# Altium PCB Soil_Moisture_Sensor.PcbDoc
Units mm, origin at the board's own origin, x right, y up, seen from the top; angles counter-clockwise.
Board outline 188.16 x 66 mm, 2 copper layers (Top Layer, Bottom Layer); 85 components, 58 nets, 300 pads, 137 vias.
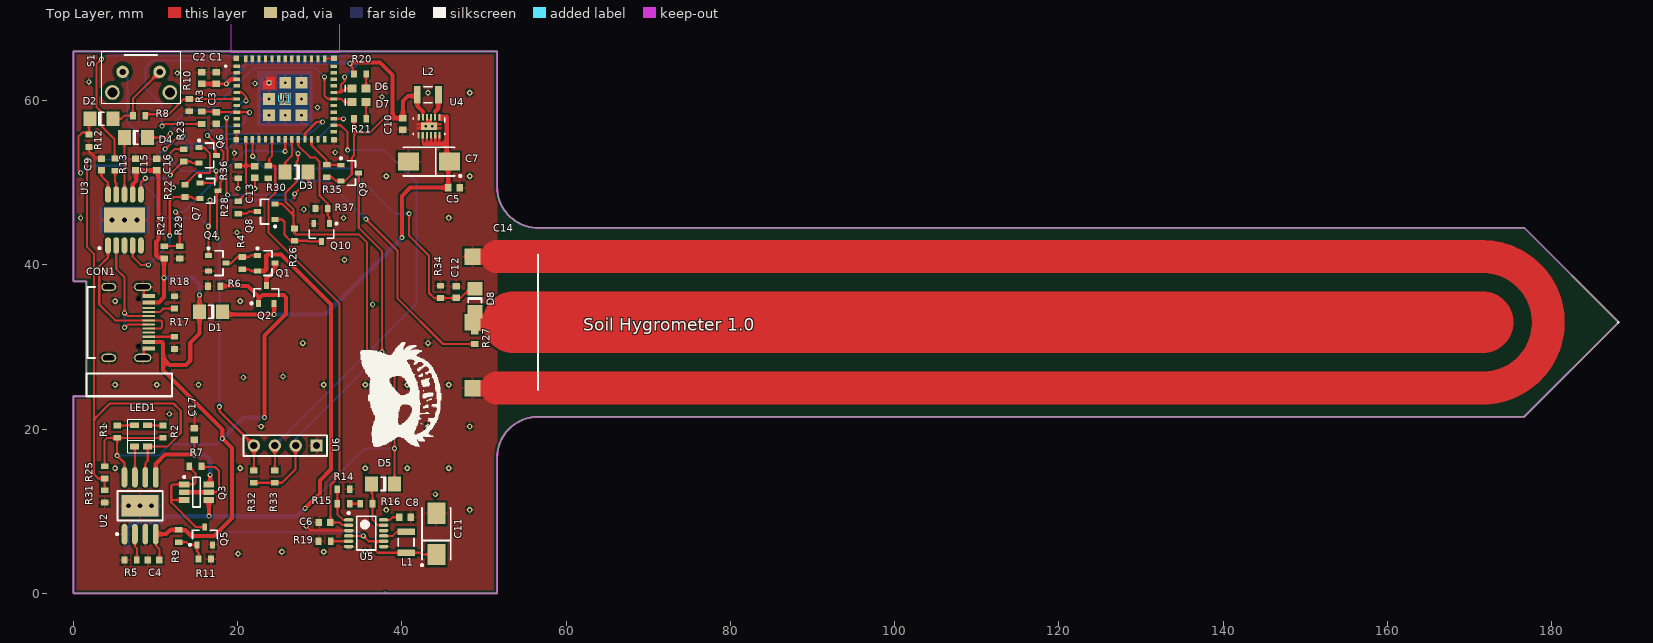
[diagram p0: Top Layer view]
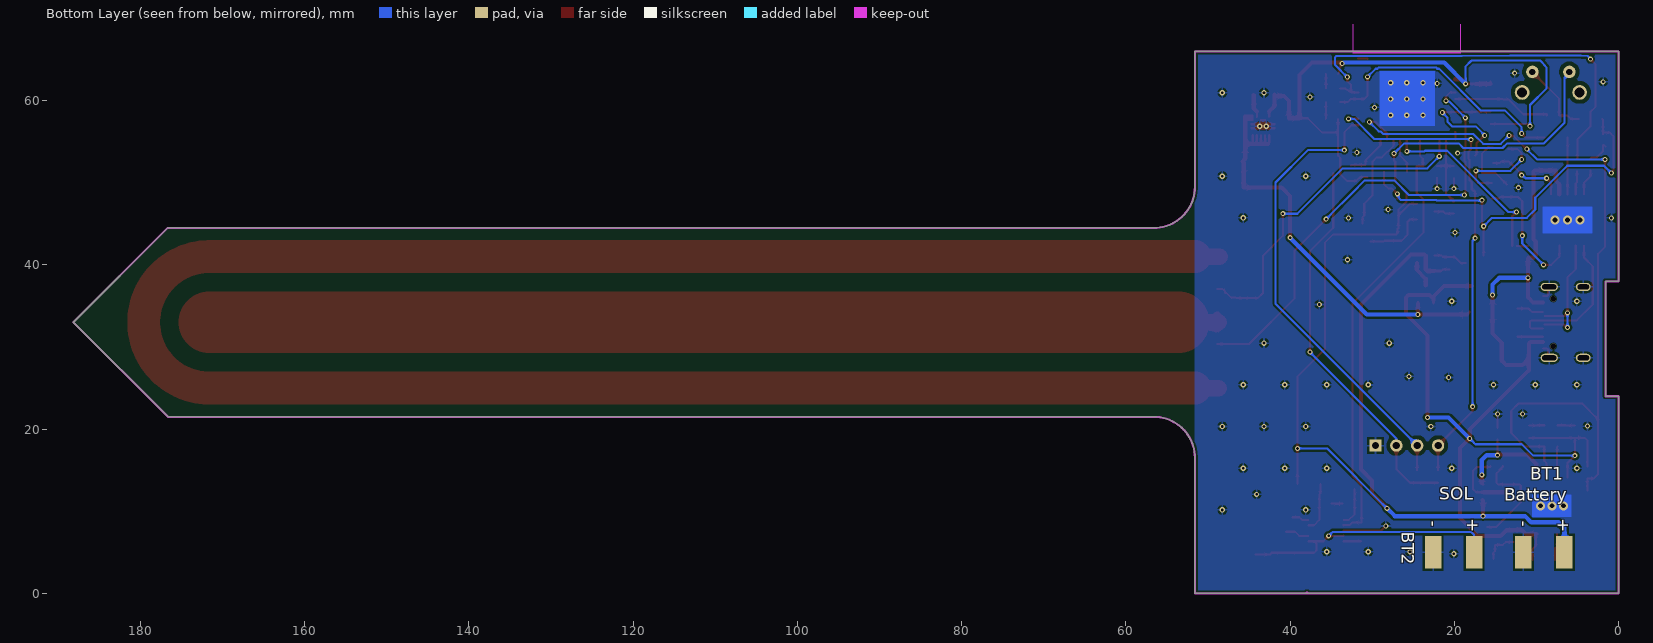
[diagram p1: Bottom Layer view, seen from below]

## Layer stack, top to bottom
Top Solder: solder mask 0.0102, Solder Resist, Dk 3.5
Top Layer: signal copper 0.0356
Dielectric 1: dielectric 0.32, FR-4, Dk 4.8
Bottom Layer: signal copper 0.0356
Bottom Solder: solder mask 0.0102, Solder Resist, Dk 3.5

## Board outline
0,0 0,24 1.6,24 1.6,38 0,38 0,66 51.6,66 51.6,49.5 ccw(c56.6,49.5) 56.6,44.5 176.683,44.5 188.163,33.02 176.643,21.5 176.6,21.5 56.6,21.5 ccw(c56.6,16.5) 51.6,16.5 51.6,0

## Design rules (kind name [scope] priority, off if disabled: settings)
Clearance Clearance_1 [HasFootprint('USB-TYPE_C')] p1: gap=0.1 ignorepadtopadclearanceinfootprint=TRUE
Clearance DSS0012A [HasFootprint('DSS0012A')] p2: gap=0.1 ignorepadtopadclearanceinfootprint=TRUE
Clearance [All] p3: gap=0.254 ignorepadtopadclearanceinfootprint=TRUE except(0.508: Arc-THPad Track-THPad SMDPad-THPad THPad-THPad THPad-Via THPad-Fill THPad-Poly THPad-Region THPad-Text THPad-Hole)
ComponentClearance [All] p1: gap=0.254 collisioncheckmode=3 verticalgap=2540 showdistances=FALSE donotcheckwithout3dbody=TRUE
HoleToHoleClearance HoleToHoleClearance_3 [HasFootprint('ESOP100-10')] p1: gap=0 allowstackedmicrovias=TRUE
HoleToHoleClearance HoleToHoleClearance_2 [HasFootprint('SOP127P780-8M')] p2: gap=0 allowstackedmicrovias=TRUE
HoleToHoleClearance HoleToHoleClearance_1 [HasFootprint('XCVR_ESP32-C3-MINI-1-N4')] p3: gap=0 allowstackedmicrovias=FALSE
HoleToHoleClearance [All] p4: gap=0.254 allowstackedmicrovias=TRUE
MinimumSolderMaskSliver CD3216-1206 [HasFootprint('CD3216-1206')] p1: minsoldermaskwidth=0.05
MinimumSolderMaskSliver TSOP65P490X110-12L [HasFootprint('TSOP65P490X110-12L')] p2: minsoldermaskwidth=0.02
MinimumSolderMaskSliver DSS0012A_1 [HasFootprint('DSS0012A')] p3: minsoldermaskwidth=0.1
MinimumSolderMaskSliver ESOP100-10 [HasFootprint('ESOP100-10')] p4: minsoldermaskwidth=0.09
MinimumSolderMaskSliver XCVR_ESP32-C3-MINI-1-N4 [HasFootprint('XCVR_ESP32-C3-MINI-1-N4')] p5: minsoldermaskwidth=0.1
MinimumSolderMaskSliver SOT95P330-6M [HasFootprint('SOT95P330-6M')] p6: minsoldermaskwidth=0.04
MinimumSolderMaskSliver USB-TYPE_C [HasFootprint('USB-TYPE_C')] p7: minsoldermaskwidth=0.04
MinimumSolderMaskSliver [All] p8: minsoldermaskwidth=0.254
NetAntennae CAP-SENSOR [InNet('NetC14_3')] p1: netantennaetolerance=200
NetAntennae [All] p2: netantennaetolerance=0
PolygonConnect [All] p1: connectstyle=Relief reliefconductorwidth=0.254 reliefentries=4 polygonreliefangle="90 Angle" airgapwidth=0.254
RoutingLayers RoutingLayers_EX_GND [InNet('GND')] p1: top layer_v5=FALSE bottom layer_v5=FALSE
RoutingLayers [All] p2: top layer_v5=TRUE bottom layer_v5=TRUE
RoutingVias [All] p1: holewidth=0.33 width=0.61 viastyle="Through Hole" minholewidth=0.33 minwidth=0.61 maxholewidth=0.33 maxwidth=0.61
SilkToSilkClearance RED_GREEN_LED1206 [HasFootprint('RED_GREEN_LED1206')] p1: silktosilkclearance=0.1
SilkToSilkClearance [All] p2: silktosilkclearance=0.254
SilkToSolderMaskClearance RED_GREEN_LED1206_1 [HasFootprint('RED_GREEN_LED1206')] p1: minsilkscreentomaskgap=0.1 clearancetoexposedcopper=TRUE
SilkToSolderMaskClearance CD1608-0603 [HasFootprint('CD1608-0603')] p2: minsilkscreentomaskgap=0.05 clearancetoexposedcopper=TRUE
SilkToSolderMaskClearance CD3216-1206_1 [HasFootprint('CD3216-1206')] p3: minsilkscreentomaskgap=0.1 clearancetoexposedcopper=TRUE
SilkToSolderMaskClearance [IsPad] p4: minsilkscreentomaskgap=0.254 clearancetoexposedcopper=TRUE
SolderMaskExpansion [All] p1: expansion=0.102 istentingtop=FALSE
SupplyNets "Schematic Supply Nets_5" [InNet('GND')] p1: voltage=0.000
SupplyNets "Schematic Supply Nets_4" [InNet('GPIO10')] p2: voltage=0.000
SupplyNets "Schematic Supply Nets_3" [InNet('VIN')] p3: voltage=0.000
SupplyNets "Schematic Supply Nets_2" [InNet('VBAT')] p4: voltage=0.000
SupplyNets "Schematic Supply Nets_1" [InNet('VMCU')] p5: voltage=0.000
SupplyNets "Schematic Supply Nets" [InNet('VBUS')] p6: voltage=0.000
Width [All] p1: maxlimit=85 minlimit=0.254 preferedwidth=0.254
23 further rules are at their usual default settings.

## Classes and differential pairs
net class POWER: VBAT VBUS VIN VMCU

## Components (designator, comment, footprint, x,y, rotation, side; value= is the part's Value field where it differs from the comment)
BT1 "Battery" BATTERY 26.6,33 r270 bottom
BT2 "SOL-Battery" BATTERY-SOL 26.6,33 r270 bottom
C1 "25V" CAPC1608L 17.399,62.738 r270 top value=106
C2 "50V" CAPC1608L 15.621,62.738 r270 top value=104
C3 "25V" CAPC1608L 17.399,57.9 r90 top value=105
C4 "25V" CAPC1608L 9.779,4.064 r0 top value=106
C5 "25V" CAPC1608L 46.355,49.403 r180 top value=106
C6 "25V" CAPC1608L 30.607,8.636 r180 top value=475
C7 "16V" TC6032-2412 43.307,52.578 r180 top value=107
C8 "25V" CAPC1608L 40.386,9.271 r0 top value=105
C9 "50V" CAPC1608L 3.429,52.197 r270 top value=104
C10 "25V" CAPC1608L 40.132,57.15 r270 top value=106
C11 "16V" TC6032-2412 44.196,7.239 r90 top value=107
C12 "50V" CAPC1608L 46.609,36.703 r270 top value=104
C13 "50V" CAPC1608L 22.098,51.308 r90 top value=104
C14 "CAP-SENSOR" CAP-SENSOR 51.6,33 r90 top locked
C15 "25V" CAPC1608L 7.62,52.197 r90 top value=106
C16 "50V" CAPC1608L 10.16,52.197 r90 top value=104
C17 "25V" CAPC1608L 14.732,19.431 r270 top value=106
CON1 "USB-TYPEE_C" USB-TYPE_C 9,33 r270 top locked
D1 "1N4148" CD3216-1206 16.764,34.29 r0 top
D2 "1N4148" CD3216-1206 3.429,57.785 r180 top
D3 "1N4148" CD3216-1206 27.178,51.308 r0 top
D4 "1N4148" CD3216-1206 7.62,55.499 r180 top
D5 "1N4148" CD3216-1206 37.719,13.335 r0 top
D6 "Green" CD1608-0603 34.798,61.468 r180 top
D7 "Blue" CD1608-0603 34.798,59.817 r180 top
D8 "1N4148" CD3216-1206 48.895,35.687 r90 top
L1 "2A" INDC2520X06N 40.513,6.223 r270 top value=10uH
L2 "2A" INDC2520X06N 43.18,60.706 r0 top value=2.2uH
LED1 "RED_GREEN_LED" RED_GREEN_LED1206 8.255,19.177 r90 top
Q1 "AO3401,A19T" SOT-23B_L 23.495,40.209 r0 top
Q2 "AO3401,A19T" SOT-23B_L 23.495,36.399 r90 top
Q3 "AO6801" SOT95P330-6M 14.986,12.319 r0 top
Q4 "AO3400,A09T" SOT-23B_L 17.526,40.209 r0 top
Q5 "S8050,J3Y" SOT-23B_L 16.002,6.985 r90 top
Q6 "S8050,J3Y" SOT-23B_L 16.383,53.34 r0 top
Q7 "S8050,J3Y" SOT-23B_L 16.51,49.022 r0 top
Q8 "AO3401,A19T" SOT-23B_L 23.495,46.482 r180 top
Q9 "AO3401,A19T" SOT-23B_L 33.655,51.181 r0 top
Q10 "AO3400,A09T" SOT-23B_L 30.226,43.942 r270 top
R1 "Res1" RESC1608L 5.334,19.685 r270 top value=1K
R2 "Res1" RESC1608L 10.922,19.685 r270 top value=1K
R3 "Res1" RESC1608L 15.621,57.912 r270 top value=10K
R4 "Res1" RESC1608L 20.574,40.209 r270 top value=1M
R5 "Res1" RESC1608L 6.985,4.064 r0 top value=1.2K
R6 "Res1" RESC1608L 17.145,37.415 r0 top value=10K
R7 "Res1" RESC1608L 14.859,15.494 r180 top value=10K
R8 "Res1" RESC1608L 8.001,58.166 r180 top value=3.6K
R9 "Res1" RESC1608L 12.827,6.985 r90 top value=4.7K
R10 "Res1" RESC1608L 14.097,59.45 r90 top value=10K
R11 "Res1" RESC1608L 16.002,4.191 r0 top value=10K
R12 "Res1" RESC1608L 1.905,55.118 r90 top value=1M
R13 "Res1" RESC1608L 5.08,52.197 r270 top value=300R
R14 "Res1" RESC1608L 32.893,12.7 r0 top value=330K
R15 "Res1" RESC1608L 32.893,10.922 r0 top value=270K
R16 "Res1" RESC1608L 35.687,10.922 r0 top value=1M
R17 "Res1" RESC1608L 12.319,30.5 r90 top value=5.1K
R18 "Res1" RESC1608L 12.319,35.433 r270 top value=5.1K
R19 "Res1" RESC1608L 30.607,6.35 r0 top value=240K
R20 "Res1" RESC1608L 34.925,63.246 r0 top value=1K
R21 "Res1" RESC1608L 34.925,57.785 r0 top value=1K
R22 "Res1" RESC1608L 13.589,49.022 r270 top value=10K
R23 "Res1" RESC1608L 13.462,53.34 r270 top value=10K
R24 "Res1" RESC1608L 11.049,41.529 r270 top value=3.6K
R25 "Res1" RESC1608L 3.81,14.732 r90 top value=36K
R26 "Res1" RESC1608L 26.924,43.688 r90 top value=10K
R27 "Res1" RESC1608L 48.895,31.115 r270 top value=10K
R28 "Res1" RESC1608L 20.066,46.99 r270 top value=10K
R29 "Res1" RESC1608L 12.954,41.529 r90 top value=10K
R30 "Res1" RESC1608L 23.749,51.308 r90 top value=1M
R31 "Res1" RESC1608L 3.81,11.811 r90 top value=100K
R32 "Res1" RESC1608L 21.99,14.224 r90 top value=10K
R33 "Res1" RESC1608L 24.53,14.224 r90 top value=10K
R34 "Res1" RESC1608L 44.704,36.703 r270 top value=1M
R35 "Res1" RESC1608L 30.861,51.435 r270 top value=10K
R36 "Res1" RESC1608L 20.066,51.308 r90 top value=10K
R37 "Res1" RESC1608L 30.226,46.863 r0 top value=10K
S1 "Key" KEY 8.255,63.5 r0 top locked
U1 "ESP32-C3-MINI-1" XCVR_ESP32-C3-MINI-1-N4 25.8,60.2 r0 top locked
U2 "TP4056" SOP127P780-8M 8.128,10.668 r90 top
U3 "CH340K" ESOP100-10 6.223,45.466 r90 top
U4 "TPS62740" DSS0012A 43.307,56.896 r270 top
U5 "LTC3105" TSOP65P490X110-12L 35.653,7.325 r0 top
U6 "OLED-128-32" OLED-128-32 25.8,18 r180 top locked

## Footprints (in the part's own frame and the unit in brackets; to place one, negate y for a bottom-side part, rotate by r counter-clockwise, add the part's x,y. Pads: shape width x height; smd on the part's side, far side on the other; paste and mask are expansions set on the pad)
BATTERY [mm] "BATTERY"
  rect 4x2 smd: 1(28,20) 2(28,15)
BATTERY-SOL [mm] "BATTERY"
  rect 4x2 smd: 1(28,9) 2(28,4)
CAP-SENSOR [mm] "CAP-SENSOR"
  rect 2x2 smd mask+0.102: 1(-8,3)
  rect 2x2 smd: 2(8,3) 3(0,3)
  Top Layer lines w2: 8,3.048 8,0 ; -8.001,2.921 -8,0 ; 0,2.921 0,0
  Top Layer lines w4: -8,0 -8,-120 ccw(c0,-120) 8,-120 8,0
  Top Layer lines w7.5: 0,-2 0,-120
  silkscreen extent -8.25,-136.53 8.25,-5
CAPC1608L [mm] "Chip Capacitor, Body 1.6x0.8mm, IPC High Density"
  rect 0.8x0.9 smd: 1(-0.7,0) 2(0.7,0)
  body extent -0.87,-0.48 0.87,0.48, height 0.85
CD1608-0603 [mm] "Chip Diode; Body 1.6 x 0.8 mm (LxW typ)"
  rect 1.1x1 smd: 1(-0.85,0) 2(0.85,0)
  silkscreen extent 1.7,-0.4 1.7,0.4
CD3216-1206 [mm] "Chip Diode; Body 3.2 x 1.6 mm (LxW typ)"
  rect 1.6x1.8 smd: 1(-1.4,0) 2(1.4,0)
  silkscreen extent -0.3,-0.8 0.3,0.8
DSS0012A [mm]
  rect 0.8x0.25 smd paste+0 mask+0.051: 1(-1.1,1.27) 2(-1.1,0.75) 3(-1.1,0.25) 4(-1.1,-0.25) 5(-1.1,-0.75) 6(-1.1,-1.25) 7(1.1,-1.27) 8(1.1,-0.762) 9(1.1,-0.254) 10(1.1,0.254) 11(1.1,0.762) 12(1.1,1.25)
  rect 0.9x2 smd paste-0.45 mask+0.051: 13(0,0)
  Top Layer region: -0.125,-1.5 -0.375,-1.5 -0.375,-1 -0.45,-1 -0.45,1 -0.375,1 -0.375,1.5 -0.125,1.5 -0.125,1 0.125,1 0.125,1.5 0.375,1.5 0.375,1 0.45,1 0.45,-1 0.375,-1 0.375,-1.5 0.125,-1.5 0.125,-1 -0.125,-1
  silkscreen extent -1.03,-1.91 1.04,1.91
ESOP100-10 [mm] "10-Pin Small Outline Package 1.00 mm Pitch and Pad"
  rect 3x5 smd: 0(0,0)
  oval 2x0.7 smd: 1(-3.1,2) 2(-3.1,1) 3(-3.1,0) 4(-3.1,-1) 5(-3.1,-2) 6(3.1,-2) 7(3.1,-1) 8(3.1,0) 9(3.1,1) 10(3.1,2)
  Bottom Layer region: -1.651,-3.048 1.651,-3.048 1.651,3.048 -1.651,3.048
  silkscreen extent -3.55,2.92 -3.3,3.17, body extent -2.85,-3.17 2.85,3.43, height 2.2
INDC2520X06N [mm] "Chip Inductor, 2-Leads, Body 2.50x2.00mm, IPC Medium Density"
  rect 0.8x2.14 smd: 1(-1.28,0) 2(1.28,0)
  silkscreen extent -0.5,-0.97 0.5,0.97, body extent -1.25,-1 1.25,1, height 0.6
KEY [mm]
  round 1.8 hole 1.2: 0(-3.5,-2.5) 0(3.5,-2.5)
  round 1.524 hole 0.762: 1(2.25,-0.007) 2(-2.25,0)
  silkscreen extent -4.83,-3.81 4.83,2.5
OLED-128-32 [mm]
  rect 1.5x1.5 hole 0.9: 1(-3.81,0)
  round 1.5 hole 0.9: 2(-1.27,0) 3(1.27,0) 4(3.81,0)
  silkscreen extent -5.08,-1.27 5.08,1.27
RED_GREEN_LED1206 [mm]
  rect 0.7x1.1 smd: 1(-1.3,0.8) 2(-1.3,-0.8) 3(1.3,-0.8) 4(1.3,0.8)
  silkscreen extent -2.03,-1.65 2.03,1.65
RESC1608L [mm] "Chip Resistor, Body 1.6x0.8mm, IPC High Density"
  rect 0.7x0.9 smd: 1(-0.75,0) 2(0.75,0)
  body extent -0.85,-0.48 0.85,0.48, height 0.6
SOP127P780-8M [mm] "SOP, 8-Leads, Body 5.3x5.3mm, Pitch 1.27mm, IPC Low Density"
  oval 2.5x0.7 smd: 1(-3.45,1.905) 2(-3.45,0.635) 3(-3.45,-0.635) 4(-3.45,-1.905) 5(3.45,-1.905) 6(3.45,-0.635) 7(3.45,0.635) 8(3.45,1.905)
  rect 2.6x4.5 smd: 9(0,0)
  Bottom Layer region: -1.397,-2.413 1.397,-2.413 1.397,2.413 -1.397,2.413
  silkscreen extent -3.57,-2.75 1.8,2.93, body extent -2.73,-2.75 2.73,2.75, height 2.03
SOT95P330-6M [mm]
  rect 1.3x0.7 smd: 1(-1.5,0.95) 2(-1.5,0) 3(-1.5,-0.95) 4(1.5,-0.95) 5(1.5,0) 6(1.5,0.95)
  silkscreen extent -1.62,-1.8 0.45,1.97, body extent -1.2,-1.8 1.2,1.8
SOT-23B_L [mm] "SOT23, 3-Leads, Body 2.9x1.3mm, Pitch 0.95mm, Lead Span 2.4mm, IPC High Density"
  rect 0.85x0.6 smd: 1(-1.075,0.95) 2(-1.075,-0.95) 3(1.075,0)
  silkscreen extent -1.2,-1.5 0.7,1.92, body extent -0.7,-1.5 0.7,1.5, height 1.14
TC6032-2412 [mm] "Capacitor, SM Tantalum; Body 6.0 x 3.2 mm (LxW typ)"
  rect 2.6x2.2 smd: 1(-2.5,0) 2(2.5,0)
  silkscreen extent -3.93,-1.75 3.15,1.87, body extent -3.05,-1.65 3.18,1.65, height 3
TSOP65P490X110-12L [mm] "TSOP, 12-Leads, Body 4.04x3.00mm, Pitch 0.65mm, IPC High Density"
  oval 1.15x0.42 smd: 1(-2.125,1.625) 2(-2.125,0.975) 3(-2.125,0.325) 4(-2.125,-0.325) 5(-2.125,-0.975) 6(-2.125,-1.625) 7(2.125,-1.625) 8(2.125,-0.975) 9(2.125,-0.325) 10(2.125,0.325) 11(2.125,0.975) 12(2.125,1.625)
  silkscreen extent -2.25,-2.05 1.15,2.57, body extent -1.55,-2.05 1.55,2.05, height 1.1
USB-TYPE_C [mm]
  oval 1x2.1 hole 0.6 slot 1.7 at 90 deg: 1(-4.32,-0.55) 1(4.32,-0.55)
  oval 1x1.8 hole 0.6 slot 1.4 at 90 deg: 1(-4.32,-4.7) 1(4.32,-4.7)
  rect 0.5x1.5 smd: 2(-3.2,0.2) 3(-2.4,0.2) 12(2.4,0.2) 13(3.2,0.2)
  rect 0.25x1.5 smd: 4(-1.75,0.2) 5(-1.25,0.2) 6(-0.75,0.2) 7(-0.25,0.2) 8(0.25,0.2) 9(0.75,0.2) 10(1.25,0.2) 11(1.75,0.2)
  silkscreen extent -4.32,-7.3 4.32,-6.35, body extent -4.32,-7.37 4.32,0.13, height 3.26
XCVR_ESP32-C3-MINI-1-N4 [mm]
  rect 0.8x0.4 smd: 1(-5.9,4) 2(-5.9,3.2) 3(-5.9,2.4) 4(-5.9,1.6) 5(-5.9,0.8) 6(-5.9,0) 7(-5.9,-0.8) 8(-5.9,-1.6) 9(-5.9,-2.4) 10(-5.9,-3.2) 11(-5.9,-4) 25(5.9,-4) 26(5.9,-3.2) 27(5.9,-2.4) 28(5.9,-1.6) 29(5.9,-0.8) 30(5.9,0) 31(5.9,0.8) 32(5.9,1.6) 33(5.9,2.4) 34(5.9,3.2) 35(5.9,4)
  rect 0.4x0.8 smd: 12(-4.8,-4.9) 13(-4,-4.9) 14(-3.2,-4.9) 15(-2.4,-4.9) 16(-1.6,-4.9) 17(-0.8,-4.9) 18(0,-4.9) 19(0.8,-4.9) 20(1.6,-4.9) 21(2.4,-4.9) 22(3.2,-4.9) 23(4,-4.9) 24(4.8,-4.9) 36(4.8,4.9) 37(4,4.9) 38(3.2,4.9) 39(2.4,4.9) 40(1.6,4.9) 41(0.8,4.9) 42(0,4.9) 43(-0.8,4.9) 44(-1.6,4.9) 45(-2.4,4.9) 46(-3.2,4.9) 47(-4,4.9) 48(-4.8,4.9)
  rect 1.45x1.45 smd: 49(-1.975,-1.975) 49(-1.975,0) 49(0,-1.975) 49(0,0) 49(0,1.975) 49(1.975,-1.975) 49(1.975,0) 49(1.975,1.975)
  rect 0.6x0.6 smd paste-1 mask+0: 49(-1.975,1.975)
  rect 0.7x0.7 smd: 50(5.95,4.95) 51(5.95,-4.95) 52(-5.95,-4.95) 53(-5.95,4.95)
  Top Layer region: -1.25,1.25 -2.7,1.25 -2.7,2.1 -2.1,2.7 -1.25,2.7
  Bottom Layer region: -3.429,-3.302 3.302,-3.302 3.302,3.429 -3.429,3.429
  Keep-Out Layer region: 6.6,5.6 -6.6,5.6 -6.6,11 6.6,11
  Keep-Out Layer region: 6.6,5.6 -6.6,5.6 -6.6,11 6.6,11
  silkscreen extent -7.35,3.9 -7.15,4.1

## Part data
BT1: "Multicell Battery", LatestRevisionDate=17-Jul-2002, LatestRevisionNote="Re-released for DXP Platform.", PackageDescription="Battery; 2 Leads", PackageReference=BAT-2, Published=24-Mar-1999, Publisher="Altium Limited"
BT2: library part Battery, "Multicell Battery", LatestRevisionDate=17-Jul-2002, LatestRevisionNote="Re-released for DXP Platform.", PackageDescription="Battery; 2 Leads", PackageReference=BAT-2, Published=24-Mar-1999, Publisher="Altium Limited"
C1 C2 C3 C4 C5 C6 C8 C9 C10 C12 C13 C15 C16 C17: library part Cap, "Capacitor", LatestRevisionDate=17-Jul-2002, LatestRevisionNote="Re-released for DXP Platform.", PackageDescription="Radial Cap, Thru-Hole; 2 Leads; 0.3 in Pin Spacing", PackageReference=RAD-0.3, Published=8-Jun-2000, Publisher="Altium Limited"
C7 C11: library part "Cap Pol1", "Polarized Capacitor (Radial)", LatestRevisionDate=17-Jul-2002, LatestRevisionNote="Re-released for DXP Platform.", PackageDescription="Polarized Capacitor (Radial); 2 Leads", PackageReference=RB7.6-15, Published=8-Jun-2000, Publisher="Altium Limited"
D1 D2 D3 D4 D5 D8: library part Diode, "Default Diode", Code_JEDEC=DO-214-AB, LatestRevisionDate=17-Jul-2002, LatestRevisionNote="Re-released for DXP Platform.", PackageDescription="DO-214-AB/SMC; 2 C-Bend Leads; Body 7.9 x 5.9 mm, inc. leads (LxW)", PackageReference=SMC, PackageVersion=Sep-1996, Published=8-Jun-2000, Publisher="Altium Limited"
D6 D7: library part LED0, "Typical INFRARED GaAs LED", LatestRevisionDate=08-Jul-2005, LatestRevisionNote="Mech Layer 1 removed.", PackageDescription="LED; 2 Leads", PackageReference=LED-0, Published=8-Jun-2000, Publisher="Altium Limited"
L1 L2: library part Inductor, "Inductor", Code_IEC=1005, Code_JEITA=0402, LatestRevisionDate=29-May-2009, LatestRevisionNote="IPC-7351 Footprint Added.", PackageDescription="Chip Inductor", PackageReference=0402-A, Published=8-Jun-2000, Publisher="Altium Limited"
Q1 Q2 Q8 Q9: library part PMOS-2, "P-Channel Power MOSFET", ComponentLink1Description="Manufacturer Link", ComponentLink1URL=http://www.irf.com/, DatasheetVersion=PD-9.390D, LatestRevisionDate=17-Jul-2002, LatestRevisionNote="Re-released for DXP Platform.", Note="Pin 4 not drawn and electrically connected to Pin 2.", PackageDescription="TO, Thru-Hole, Vertical, Heatsink Mounted; 3 In-Line Leads; Pitch 2.54 mm", PackageReference=TO-220AB, PackageVersion=Feb-1997, Published=8-Jun-2000, Publisher="Altium Limited"
Q4 Q10: library part NMOS-2, "N-Channel Power MOSFET", ComponentLink1Description="Manufacturer Link", ComponentLink1URL=http://www.irf.com/, DatasheetVersion=PD-9.814, LatestRevisionDate=17-Jul-2002, LatestRevisionNote="Re-released for DXP Platform.", Note="Pin 2 is electrically connected to pin 4.", PackageDescription="TO, Thru-Hole, Vertical, Heatsink Mounted; 3 In-Line Leads; Pitch 2.54 mm", PackageReference=TO-220AB, PackageVersion=Feb-1997, Published=8-Jun-2000, Publisher="Altium Limited"
Q5 Q6 Q7: library part NPN, "NPN Bipolar Transistor", Code_JEDEC=TO-226-AA, LatestRevisionDate=17-Jul-2002, LatestRevisionNote="Re-released for DXP Platform.", PackageDescription="TO, Flat Index; 3 In-Line, Axial Leads; Body Dia. 4.8mm; Leads 0.55 x 0.51 mm (max)", PackageReference=TO-226-AA, Published=8-Jun-2000, Publisher="Altium Limited"
R1 R2 R3 R4 R5 R6 R7 R8 R9 R10 R11 R12 R13 R14 R15 R16 R17 R18 R19 R20 R21 R22 R23 R24 R25 R26 R27 R28 R29 R30 R31 R32 R33 R34 R35 R36 R37: "Resistor", LatestRevisionDate=17-Jul-2002, LatestRevisionNote="Re-released for DXP Platform.", PackageDescription="Axial Device, Thru-Hole; 2 Leads; 0.3 in Pin Spacing", PackageReference=AXIAL-0.3, Published=8-Jun-2000, Publisher="Altium Limited"
S1: library part SW-SPST, "Single-Pole, Single-Throw Switch", LatestRevisionDate=17-Jul-2002, LatestRevisionNote="Re-released for DXP Platform.", PackageDescription="Switch; 2 Leads", PackageReference=SPST-2, Published=24-Mar-1999, Publisher="Altium Limited"

## Via types
v1: diameter 0.61, hole 0.33, Top Layer to Bottom Layer, 87 vias
v2: diameter 0.66, hole 0.33, Top Layer to Bottom Layer, 42 vias
v3: diameter 1.1, hole 0.6, Top Layer to Bottom Layer, 6 vias
v4: diameter 0.65, hole 0.65, Top Layer to Bottom Layer, 2 vias

## Nets (pads, with @x,y where several pads share a name; then routed paths per layer and width w, separated by ;. In a path a pad name is that pad's centre, name@x,y a point inside that pad or via, vN(x,y) a via of type N, cw(c..) or ccw(c..) an arc to the next point about the centre after c; other vN are vias at no path point)
CHIP_PU: C3.2 Q6.3 R3.1 U1.8 | length 15.3
  Top Layer w0.254: R3.1 17.337,58.662 C3.2 21.41,58.6 v1(21.463,58.547) ; v1@16.383,55.753 17.297,54.839 17.297,53.501 Q6.3
  Bottom Layer w0.254: v1(16.313,55.763) 17.422,56.871 20.295,56.871 20.845,57.421 20.845,57.929 v1(21.463,58.547)
DTR: Q7.2 R22.2 U3.4 | length 16.5
  Top Layer w0.254: U3.4 7.223,40.97 8.188,40.005 v1(9.144,40.005) ; v1(11.735,43.561) 11.735,47.752 12.255,48.272 R22.2 14.402,48.272 14.602,48.072 Q7.2
  Bottom Layer w0.254: v1(9.144,40.005) 11.735,42.596 v1(11.735,43.561)
GND: BT1.2 BT2.2 C1.1 C2.1 C3.1 C4.1 C5.1 C6.2 C7.2 C8.2 C9.1 C10.2 C11.2 C12.1 C13.1 C14.1 C14.2 C15.2 C16.2 C17.1 CON1.1 CON1.2 CON1.13 Q4.2 Q5.2 Q10.2 R5.1 R6.1 R10.1 R11.2 R12.1 R14.2 R17.1 R18.1 R19.1 R29.1 R30.1 R31.1 R34.1 R36.1 R37.1 U1.1 U1.2 U1.11 U1.14 U1.36 U1.37 U1.38 U1.39 U1.40 U1.41 U1.42 U1.43 U1.44 U1.45 U1.46 U1.47 U1.48 U1.49 U1.50 U1.51 U1.52 U1.53 U2.1 U2.3 U2.9 U3.0 U3.3 U4.3 U4.4 U4.13 U5.3 U5.6 U5.7 U6.1 | length 18.3
  Top Layer w0.254: R12.1@1.582,54.399 1.805,54.622 1.905,54.622 1.905,53.848 2.667,53.086 3.24,53.086 C9.1 ; CON1.1@8.45,28.68 8.577,28.807 8.577,29.677 8.7,29.8 CON1.13 ; CON1.1@8.45,37.32 8.577,37.193 8.577,36.323 8.7,36.2 CON1.2 ; C17.1 v1(14.732,21.844) ; U1.52 19.85,56.15 U1.11 ; v1(20.066,49.276) R36.1 ; v1(22.098,49.276) C13.1 ; v1@28.448,8.128 28.926,7.65 U5.3 ; U1.36 30.65,65.15 U1.50
  other v1: 20.066,4.826 28.351,8.208 8.128,10.668 44.069,12.065 3.789,20.375 11.684,21.844 20.701,26.289 25.527,26.416 36.449,35.179 19.931,43.934 6.223,45.466 0.889,45.72 32.893,45.72 28.067,46.736 12.192,49.403 19.609,53.599 31.887,53.693 23.825,58.225 25.8,58.225 27.775,58.225 29.725,59.175 23.825,60.2 25.8,60.2 27.775,60.2 37.592,60.452 22.105,62.096 23.825,62.175 25.8,62.175 27.775,62.175 1.884,62.285 12.666,63.345
  other v2: 25.4,5.08 30.48,5.08 35.56,5.08 38.1,10.16 48.26,10.16 5.08,15.24 20.32,15.24 35.56,15.24 40.64,15.24 45.72,15.24 22.86,20.32 38.1,20.32 43.18,20.32 48.26,20.32 5.08,25.4 10.16,25.4 15.24,25.4 30.48,25.4 35.56,25.4 40.64,25.4 45.72,25.4 27.94,30.48 43.18,30.48 5.08,35.56 20.32,35.56 33.02,40.64 45.72,45.72 38.1,50.8 48.26,50.8 42.926,56.896 43.688,56.896 23.825,58.225 25.8,58.225 27.775,58.225 23.825,60.2 25.8,60.2 27.775,60.2 43.18,60.96 48.26,60.96 23.825,62.175 25.8,62.175 27.775,62.175
  other v3: 6.731,10.668 8.128,10.668 9.525,10.668 4.699,45.466 6.223,45.466 7.747,45.466
GPIO0: C13.2 R28.1 R36.2 U1.12 | length 10.2
  Top Layer w0.254: R36.2 21,52.058 ; R28.1@20.176,47.85 R28.1 20.166,47.74 20.389,47.963 20.389,48.063 21,48.674 21,52.058 ; U1.12 21,52.058 ; C13.2 22.048,52.058 21,52.058
GPIO1: C12.2 D8.2 R34.2 U1.13 | length 41
  Top Layer w0.254: U1.13 21.822,55.278 21.822,53.235 v1(21.844,53.213) ; v1(40.894,46.228) 40.894,43.536 43.307,41.123 43.307,36.576 43.93,35.953 R34.2 45.618,35.953 46.559,35.953 C12.2 47.193,36.003 48.277,37.087 D8.2
  Bottom Layer w0.254: v1(21.844,53.213) 23.3,51.757 33.587,51.757 39.116,46.228 v1(40.894,46.228)
GPIO2: R27.2 U1.5 | length 57.1
  Top Layer w0.254: v1(18.669,57.912) 18.669,54.111 18.772,54.008 18.772,52.672 18.669,52.569 18.669,48.841 18.728,48.782 18.728,48.582 v1(18.796,48.514) ; U1.5 20.483,61 21.031,60.452 v1(21.031,59.969) ; v1(35.616,45.572) 35.632,45.572 39.446,41.758 39.446,35.928 45.009,30.365 R27.2
  Bottom Layer w0.254: v1(18.669,57.912) 20.658,59.901 20.963,59.901 v1(21.031,59.969) ; v1(18.796,48.514) 25.562,48.514 27.34,50.292 30.912,50.292 32.536,48.668 35.048,46.156 35.197,46.007 v1(35.616,45.572)
GPIO3: R8.1 R10.2 U1.6 | length 12.1
  Top Layer w0.254: R8.1 8.751,58.344 11.608,58.344 13.415,60.151 14.048,60.151 R10.2 U1.6
GPIO4: R24.1 R29.2 U1.18 | length 23.7
  Top Layer w0.254: R24.1 12.446,42.279 ; v1(12.446,46.431) 12.954,45.923 R29.2 ; v1(25.8,53.823) U1.18
  Bottom Layer w0.254: v1(12.446,46.431) 13.411,46.431 20.879,53.899 23.559,53.899 23.636,53.823 v1(25.8,53.823)
GPIO5: D3.1 U1.19 | length 4.3
  Top Layer w0.254: D3.1 25.778,52.448 26.6,53.27 U1.19
GPIO6: Q10.1 R37.2 U1.20 | length 12.2
  Top Layer w0.254: U1.20 27.4,54.515 28.829,53.086 29.464,53.086 29.972,52.578 29.972,48.463 30.976,47.459 R37.2 30.976,46.022 31.176,45.822 Q10.1
GPIO7: LED1.2 R25.1 R31.2 U1.21 U2.6 | length 99.6
  Top Layer w0.254: v1(1.651,52.832) 1.651,42.215 2.489,41.377 2.489,21.158 ; 2.474,21.143 2.489,21.158 ; R31.2 R25.1 3.048,13.982 2.489,14.541 2.489,21.158 ; U2.6 8.763,15.85 9.055,16.142 LED1.2 11.43,17.877 13.081,19.528 13.081,22.225 12.192,23.114 4.445,23.114 2.489,21.158 ; v1(11.176,54.102) 12.759,55.685 13.267,55.685 v1(13.335,55.753) ; U1.21 28.2,56.001 29.603,57.404 v1(30.353,57.404)
  Bottom Layer w0.254: v1(1.651,52.832) 9.906,52.832 v1(11.176,54.102) ; v1(13.335,55.753) 14.351,54.737 16.505,54.737 17.699,55.931 28.674,55.931 29.004,56.261 29.212,56.261 30.353,57.402 v1(30.353,57.404)
GPIO8: Q9.1 R35.1 U1.22 | length 5.6
  Top Layer w0.254: U1.22 29,54.578 30.811,52.767 30.811,52.235 R35.1 32.526,52.185 Q9.1
GPIO9: U1.23
GPIO10: C6.1 R30.2 U1.16 U5.2 | length 54.4
  Top Layer w0.254: U1.16 24.2,53.283 23.849,52.932 23.849,52.158 R30.2 23.849,52.058 24.587,52.058 24.587,48.768 23.749,47.93 23.749,43.955 32.385,35.319 32.385,14.281 31.307,13.203 C6.1 32.441,8.636 32.754,8.323 33.496,8.323 U5.2@33.524,8.296
GPIO18: R33.2 U1.26 U6.3 | length 56.4
  Top Layer w0.254: R33.2 U6.3 ; U1.26 32.535,57 33.401,56.134 v1(33.401,53.975)
  Bottom Layer w0.254: U6.3 41.783,35.253 41.783,50.038 37.846,53.975 v1(33.401,53.975)
GPIO19: Q7.3 R32.2 U1.27 U6.4 | length 59.8
  Top Layer w0.254: v1(17.467,43.248) 17.475,43.256 17.475,48.912 Q7.3 17.71,49.022 17.883,49.195 17.883,50.058 18.161,50.336 18.161,52.779 18.264,52.882 18.264,53.798 17.983,54.079 v1(17.983,55.245) ; v1(17.78,22.733) 17.78,22.21 U6.4 R32.2 ; U1.27 31.708,57.792 32.886,57.792 v1(32.893,57.785)
  Bottom Layer w0.254: v1(17.467,43.248) 17.467,43.234 17.78,42.922 v1(17.78,22.733) ; v1(17.983,55.245) 18.046,55.308 29.736,55.308 32.207,57.78 32.888,57.78 v1(32.893,57.785)
NetBT2_1: BT2.1 C11.1 L1.2 U5.4 U5.8 | length 33.6
  Top Layer w0.254: U5.4@33.496,7.032 U5.4 v1(35.306,7) 35.956,6.35 37.059,6.35 ; U5.8 37.059,6.35 ; C11.1 42.444,4.739 42.24,4.943 L1.2 37.084,4.943 36.805,5.222 36.805,6.096 37.059,6.35
  Bottom Layer w0.254: BT2.1 17.6,7.112 17.981,7.493 34.813,7.493 v1(35.306,7)
NetC8_1: C8.1 U5.12 | length 2
  Top Layer w0.254: U5.12 38.557,8.95 38.878,9.271 C8.1
NetC9_2: C9.2 U3.10 | length 3.3
  Top Layer w0.254: C9.2 3.429,50.8 4.223,50.006 U3.10
NetC14_3: C14.3 D8.1 R27.1 | length 7.6
  Top Layer w0.254: D8.1 48.895,33 R27.1 50.03,33 51.6,33 53.6,33
NetC17_2: C17.2 Q3.6 U2.5 | length 14
  Top Layer w0.254: v1@14.71,16.891 v1@14.859,16.742 ; v1@14.732,16.869 C17.2 ; Q3.6 Q3.6@16.667,13.45
  Top Layer w0.508: U2.5 10.033,15.748 11.176,16.891 v1@14.71,16.891 ; Q3.6@16.667,13.45 v1(16.667,14.431)
  Bottom Layer w0.508: v1(14.762,16.823) 16.07,16.823 16.667,16.226 v1(16.667,14.431)
NetCON1_5: CON1.5 R18.2 | length 3.3
  Top Layer w0.254: CON1.5 10.541,34.25 10.974,34.683 R18.2
NetCON1_6: CON1.6 CON1.8 U3.2 | length 16.3
  Top Layer w0.254: U3.2 5.223,39.481 6.223,38.481 v1(6.223,34.163) 6.628,33.758 CON1.6@9.017,33.758 ; v1(6.223,32.385) 6.319,32.385 6.676,32.742 CON1.8@9.017,32.742
  Bottom Layer w0.254: v1(6.223,32.385) v1(6.223,34.163)
NetCON1_7: CON1.7 CON1.9 U3.1 | length 18.5
  Top Layer w0.254: U3.1 4.223,40.901 3.15,39.827 3.15,35.18 5.08,33.25 CON1.7@9.352,33.25 ; CON1.9 10.646,32.25 10.795,32.399 10.795,33.101 10.646,33.25 CON1.7@9.37,33.25
NetCON1_11: CON1.11 R17.2 | length 3.1
  Top Layer w0.254: CON1.11 R17.2
NetD2_1: D2.1 R8.2 S1.1 | length 9.3
  Top Layer w0.254: D2.1 5.842,57.785 6.223,58.166 R8.2 7.251,60.239 S1.1
NetD2_2: D2.2 D3.2 Q4.1 R12.2 | length 49.2
  Top Layer w0.254: v1(0.889,51.181) 0.889,51.254 0.635,51.508 0.635,55.669 1.088,56.122 R12.2@1.905,56.122 ; R12.2 R12.2@1.905,56.122 ; D2.2 1.905,57.661 R12.2@1.905,56.122 ; v1(16.434,44.704) v1@16.434,44.8 ; Q4.1 16.434,41.159 v1@16.434,44.8 ; v1(16.637,47.879) 16.637,45.004 v1@16.434,44.8 ; v1(26.955,48.647) 27.585,49.276 28.016,49.276 28.578,49.838 D3.2
  Bottom Layer w0.254: v1(0.889,51.181) 1.778,52.07 6.274,52.07 10.16,48.184 10.16,46.736 11.176,45.72 15.418,45.72 v1(16.434,44.704) ; v1(16.637,47.879) 16.688,47.828 22.141,47.828 22.217,47.904 26.539,47.904 26.688,48.053 v1(26.955,48.647)
NetD4_2: D4.2 U3.8 | length 6.9
  Top Layer w0.254: D4.2 6.22,52.022 6.223,52.019 U3.8
NetD5_1: D5.1 R16.2 U5.11 | length 6
  Top Layer w0.254: D5.1 36.319,12.183 36.437,12.065 R16.2 36.437,8.947 37.084,8.3 U5.11
NetD6_1: D6.1 R20.2 | length 1.8
  Top Layer w0.254: D6.1 35.648,63.219 R20.2
NetD7_1: D7.1 R21.2 | length 2
  Top Layer w0.254: D7.1 35.648,57.812 R21.2
NetL1_1: L1.1 U5.9 | length 2.9
  Top Layer w0.254: U5.9 38.887,7 39.39,7.503 L1.1
NetL2_2: L2.2 U4.2 | length 2.9
  Top Layer w0.254: U4.2 44.059,57.998 44.059,58.537 44.069,58.547 44.069,58.683 ; L2.2@44.434,60.68 L2.2
  Top Layer w0.508: 44.069,58.683 44.434,59.048 L2.2@44.434,60.68
NetLED1_1: LED1.1 U2.7 | length 3.8
  Top Layer w0.254: LED1.1 7.493,17.839 U2.7
NetLED1_3: LED1.3 R2.1 | length 1.9
  Top Layer w0.254: LED1.3 9.957,20.477 9.999,20.435 R2.1
NetLED1_4: LED1.4 R1.1 | length 2.1
  Top Layer w0.254: R1.1 6.35,20.435 6.392,20.477 LED1.4
NetQ1_1: Q1.1 Q4.3 R4.1 | length 4.2
  Top Layer w0.254: Q4.3 19.202,40.209 19.952,40.959 R4.1 21.387,40.959 21.587,41.159 Q1.1
NetQ1_3: Q1.3 Q2.3 | length 3.2
  Top Layer w0.508: Q2.3 23.495,38.303 24.57,39.378 Q1.3
NetQ3_1: Q3.1 Q3.3 Q5.3 R7.2 | length 14.3
  Top Layer w0.254: 11.924,11.297 11.924,13.12 12.072,13.269 Q3.1 14.71,13.269 14.859,13.418 14.859,14.644 14.109,15.394 R7.2 ; 11.995,11.369 11.922,11.295 11.922,11.074 14.936,8.06 Q5.3 ; 12.087,11.369 Q3.3
NetQ3_2: Q3.2 Q3.5 R7.1 | length 9
  Top Layer w0.254: R7.1 15.609,15.392 17.247,15.392 17.729,14.91 17.729,12.7 17.348,12.319 Q3.5
  Top Layer w0.508: Q3.2 Q3.5
NetQ5_1: Q5.1 R9.1 R11.1 | length 4.2
  Top Layer w0.254: R9.1 13.767,6.235 14.092,5.91 Q5.1 15.052,5.128 15.252,4.928 R11.1
NetQ6_1: Q6.1 R22.1 | length 7.6
  Top Layer w0.254: R22.1 15.018,51.201 16.622,51.201 16.622,53.579 15.911,54.29 Q6.1
NetQ7_1: Q7.1 R23.1 | length 12
  Top Layer w0.254: v1(11.811,52.832) 11.811,53.594 12.307,54.09 R23.1 ; Q7.1 17.079,49.972 17.399,50.292 v1(17.399,51.451)
  Bottom Layer w0.254: v1(11.811,52.832) 13.192,51.451 v1(17.399,51.451)
NetQ8_1: Q8.1 Q10.3 R26.1 | length 7.7
  Top Layer w0.254: Q8.1 25.4,45.532 25.705,45.227 25.705,43.649 26.416,42.938 R26.1 28.524,42.938 28.595,42.867 Q10.3
NetQ8_3: Q8.3 R28.2 | length 2.5
  Top Layer w0.254: R28.2 21.107,46.24 21.349,46.482 Q8.3
NetQ9_3: Q9.3 R32.1 R33.1 U6.2 | length 47.4
  Top Layer w0.254: R32.1 R33.1 25.4,13.474 27.07,15.144 U6.2 ; Q9.3 34.747,51.181 34.747,44.501 37.592,41.656 v1(37.592,29.388)
  Bottom Layer w0.254: U6.2 27.07,18.866 v1(37.592,29.388)
NetR5_2: R5.2 U2.2 | length 3.3
  Top Layer w0.254: U2.2 7.493,5.754 7.735,5.512 R5.2
NetR13_2: R13.2 U3.9 | length 2.9
  Top Layer w0.254: R13.2 5.08,50.054 5.223,49.911 U3.9
NetR14_1: R14.1 R15.1 U5.1 | length 4.7
  Top Layer w0.254: R14.1 R15.1 32.143,9.652 32.845,8.95 U5.1
NetR15_2: R15.2 R16.1 | length 1.3
  Top Layer w0.254: R15.2 R16.1
NetR19_2: R19.2 U5.5 | length 2.2
  Top Layer w0.254: R19.2 U5.5
RTS: Q6.2 R23.2 U3.6 | length 9.7
  Top Layer w0.254: U3.6 8.223,50.006 v1(8.765,50.548) ; v1(11.811,50.927) 11.879,50.995 11.879,51.107 13.362,52.59 14.275,52.59 14.475,52.39 Q6.2
  Bottom Layer w0.254: v1(8.765,50.548) 11.336,50.548 11.715,50.927 v1(11.811,50.927)
RXD0: D4.1 D7.2 U1.30 | length 32
  Top Layer w0.254: D4.1 11.303,55.499 v1(11.811,56.007) ; v1(30.582,62.892) 30.582,60.606 30.988,60.2 U1.30 32.614,60.2 32.997,59.817 D7.2
  Bottom Layer w0.254: v1(11.811,56.007) 11.811,56.769 13.818,58.776 16.756,58.776 21.863,63.883 22.086,63.883 22.213,64.01 29.26,64.01 29.387,63.883 29.591,63.883 v1(30.582,62.892)
TXD0: D6.2 R13.1 U1.31 | length 52.2
  Top Layer w0.254: v1(3.429,65.049) 2.794,64.414 2.794,59.259 3.429,58.624 3.429,56.871 5.029,55.27 5.029,52.947 R13.1 ; U1.31 32.588,61 ; v1(33.045,62.865) 33.045,62.382 32.588,61.925 32.588,61 ; D6.2 33.299,61.468 33.045,61.301 32.588,61
  Bottom Layer w0.254: v1(3.429,65.049) 3.694,65.357 3.767,65.43 4.593,65.491 4.612,65.492 13.229,65.492 13.232,65.492 19.051,65.419 19.052,65.419 34.395,65.419 34.544,65.27 34.544,64.364 v1(33.045,62.865)
VBAT: BT1.1 D5.2 Q1.2 Q3.4 Q8.2 R4.2 R26.2 S1.2 | length 165.9
  Top Layer w0.254: Q3.4 Q3.4@16.561,11.369 ; R4.2 21.387,39.459 21.587,39.259 Q1.2 ; Q8.2 25.4,47.432 26.822,46.01 ; v1(27.356,53.569) 27.356,52.705 27.203,52.553 27.203,50.14 25.832,48.768 25.832,47.701 26.822,46.711 26.822,46.01 ; D5.2 39.119,26.388 35.738,29.769 35.738,42.748 34.798,43.688 27.073,43.688 26.924,43.837 R26.2 26.822,44.438 26.822,46.01
  Top Layer w0.508: v1(16.51,9.398) 16.498,9.41 16.498,11.306 Q3.4@16.561,11.369 ; Q1.2 23.317,39.259 23.495,39.437 23.495,41.126 23.644,41.275 25.273,41.275 31.369,35.179 31.369,15.113 30.019,13.763 30.019,12.163 v1(28.219,10.363)
  Bottom Layer w0.254: S1.2 6.005,63.315 6.604,62.716 6.604,57.277 9.093,54.788 13.582,54.788 14.141,54.229 18.91,54.229 19.482,54.8 26.124,54.8 v1(27.356,53.569) ; v1(28.219,10.363) 35.509,17.653 v1(39.116,17.653)
  Bottom Layer w0.508: BT1.1 6.6,7.946 7.314,8.66 10.648,8.66 11.386,9.398 v1(16.51,9.398) 27.254,9.398 v1(28.219,10.363)
VBUS: C4.2 C15.1 C16.1 CON1.3 CON1.12 D1.1 Q2.1 R1.2 R2.2 R6.2 R9.2 R24.2 R25.2 U2.4 U2.8 U3.7 | length 143.9
  Top Layer w0.254: R25.2 3.81,18.637 4.108,18.935 R1.2 ; U2.8 6.223,15.875 v1(5.334,16.764) R1.2 ; U2.4@10.07,7.181 10.07,5.819 10.479,5.41 C4.2 ; R2.2 R1.2 ; Q2.1 22.545,35.829 ; 10.356,35.4 10.381,35.4 10.414,35.433 10.389,35.433 10.356,35.4
  Top Layer w0.508: U3.7 7.223,49.809 7.62,50.206 C15.1 C16.1 10.21,51.497 10.356,51.351 10.356,43.104 10.091,42.839 10.091,41.173 10.389,40.875 10.953,40.875 R24.2 v1(11.049,38.423) 11.049,36.068 10.414,35.433 ; CON1.12 10.773,30.6 10.922,30.451 10.922,28.575 ; CON1.3 10.356,35.4 ; U2.4@10.07,7.181 U2.4 11.282,7.218 11.799,7.735 R9.2 12.871,7.691 13.645,7.691 14.351,6.985 17.12,6.985 19.304,9.169 19.304,17.687 v1(18.14,18.851) 18.14,19.96 10.922,27.178 10.922,28.575 ; v1(15.364,36.322) D1.1 15.364,31.645 14.224,30.505 14.224,28.321 13.716,27.813 11.684,27.813 10.922,28.575 ; R6.2 21.284,37.415 22.545,36.154 22.545,35.829 23.038,36.322 25.61,36.322 25.908,36.024 25.908,34.036 23.266,31.394 v1@23.266,21.416
  Bottom Layer w0.254: v1(5.334,16.764) 10.414,16.764 11.811,18.161 17.45,18.161 v1(18.14,18.851) ; v1(15.364,36.322) v1@15.367,36.325
  Bottom Layer w0.508: v1(11.049,38.423) 14.536,38.423 15.367,37.592 v1@15.367,36.325 ; v1(18.14,18.851) 20.705,21.416 v1(23.271,21.416)
VIN: C5.2 C7.1 D1.2 Q2.2 U4.1 U4.8 U4.9 U4.10 U4.11 U4.12 | length 55.3
  Top Layer w0.254: D1.2 D1.2@18.484,33.97 ; U4.8 42.545,54.886 42.694,54.737 ; 43.053,54.737 U4.9 ; 43.561,54.737 U4.10 ; 44.069,54.737 U4.11 ; U4.12 44.557,54.821 44.641,54.737
  Top Layer w0.508: D1.2@18.484,33.97 v1(24.445,33.97) Q2.2 ; v1(40.005,43.307) 40.005,48.387 41.021,49.403 C5.2 45.655,52.426 C7.1 45.466,52.919 45.466,54.737 ; 42.694,54.737 43.053,54.737 43.561,54.737 44.069,54.737 44.641,54.737 45.466,54.737 ; 45.466,58.039 45.466,54.737
  Bottom Layer w0.508: v1(24.445,33.97) 30.381,33.97 30.668,33.97 v1(40.005,43.307)
VMCU: C1.2 C2.2 C10.1 L2.1 Q9.2 R3.2 R20.1 R21.1 R35.2 U1.3 U4.5 | length 83.6
  Top Layer w0.254: v1(10.798,56.896) 10.858,56.896 11.124,57.162 R3.2 ; C2.2 C2.2@15.621,62.306 ; C1.2 v1@18.594,62.038 ; R35.2@30.607,50.685 R35.2 31.492,50.685 31.946,50.231 Q9.2 33.086,50.231 33.894,51.039 33.894,53.039 34.175,53.32 34.175,56.134 ; v1(33.667,64.518) 34.002,64.014 34.002,63.569 R20.1 ; R21.1 34.175,56.134 ; 38.862,57.85 37.846,57.85 36.13,56.134 34.175,56.134 ; L2.1@41.766,60.572 L2.1 ; U4.5 42.557,58.662
  Top Layer w0.508: C2.2 C1.2 ; v1(18.629,62.038) 18.629,62.066 19.164,62.6 U1.3 ; v1(33.667,64.518) 33.695,64.518 33.82,64.643 37.338,64.643 38.862,63.119 38.862,57.85 C10.1 40.132,59.944 40.76,60.572 L2.1@41.766,60.572 ; L2.1 41.9,59.319 42.557,58.662
  Bottom Layer w0.254: v1(10.798,56.896) 10.798,59.461 8.763,61.496 8.763,64.026 9.454,64.817 9.534,64.897 17.907,64.897 17.981,64.823 18.629,64.175 v1(18.629,62.038)
  Bottom Layer w0.508: v1(18.629,62.038) 21.236,64.645 33.512,64.645 33.639,64.518 v1(33.667,64.518)
pads on no net: CON1.4 CON1.10 S1.0 U1.4 U1.7 U1.9 U1.10 U1.15 U1.17 U1.24 U1.25 U1.28 U1.29 U1.32 U1.33 U1.34 U1.35 U3.5 U4.6 U4.7 U5.10
copper on no net:
  other v4: 7.95,30.11 7.95,35.89

## Polygon pours and split planes (outlines as drawn)
GND on Top Layer "Top Layer-GND" (solid, remove dead copper, pour order 0): 0,0 0,24 1.6,24 1.6,38 0,38 0,66 51.6,66 51.6,49.5 51.6,49.53 51.6,16.5 51.6,0
GND on Bottom Layer "Bottom Layer-GND" (solid, remove dead copper, pour order 1): 0,0 0,24 1.6,24 1.6,38 0,38 0,66 51.6,66 51.6,49.5 51.6,49.53 51.6,16.5 51.6,0

## Keep-outs
Keep-Out Layer:
  lines w0.254: 0,24 1.6,24 ; 0,24.003 0,0 51.6,0 51.6,16.5 cw(c56.6,16.5) 56.6,21.5 176.6,21.5 176.643,21.5 188.163,33.02 176.683,44.5 ; 1.6,24.003 1.6,38 0,38 0,66 51.6,66 51.6,49.5 ccw(c56.6,49.5) 56.6,44.5 176.6,44.5 ; 37.916,0.127 37.999,0.127 37.916,0.127

## Other copper
Top Layer:
  rectangle net VIN: 44.45,57.531 45.593,58.293
  rectangle net GND: 42.926,56.446 43.676,57.785
  pour cut-out: 51.6,16.5 cw(c56.6,16.5) 56.6,21.5 176.643,21.5 188.163,33.02 176.683,44.5 56.6,44.5 cw(c56.6,49.5) 51.6,49.5 51.6,49.53
Bottom Layer:
  pour cut-out: 51.6,16.5 cw(c56.6,16.5) 56.6,21.5 176.643,21.5 188.163,33.02 176.683,44.5 56.6,44.5 cw(c56.6,49.5) 51.6,49.5 51.6,49.53

## Silkscreen, mask and mechanical layers (free items; w line width, h text height)
Top Overlay:
  drawing of 12 lines, arcs and shapes, not listed
  text "Soil Hygrometer 1.0" at 62.103,32.004 h1.52
Top Solder:
  lines w0.4: 42.545,58.42 42.545,58.674 ; 44.069,58.293 44.069,58.674
Mechanical 13:
  lines w0.254: 51.6,16.5 51.6,49.53
Mechanical 15:
  lines w0.254: 0,24.003 0,33.003 ; 0,25.4 12,25.4 ; 0,38 0,33 45.339,33

## Text inside footprints (layer, text, board x,y; h text height)
BT1: Bottom Overlay "-" at 12.249,8.87 h1.52 r90; Bottom Overlay "+" at 7.423,9.124 h1.52 r90
BT2: Bottom Overlay "SOL" at 21.821,11.41 h1.52; Bottom Overlay "-" at 23.249,8.87 h1.52 r90; Bottom Overlay "+" at 18.423,9.124 h1.52 r90
U6: Mechanical 15 "Gnd" at 30.609,19.524 h1.52 r90; Mechanical 15 "Vcc" at 27.944,19.525 h1.52 r90; Mechanical 15 "SCL" at 25.402,19.524 h1.52 r90; Mechanical 15 "SDA" at 22.862,19.524 h1.52 r90; Mechanical 15 "OLED 128X32" at 26.545,26.89 h1.52 r90